# Altium PCB woda.PcbDoc
Units mil, origin at the board's own origin, x right, y up, seen from the top; angles counter-clockwise.
Board outline 1464.6 x 834.68 mil, 2 copper layers (Top Layer, Bottom Layer); 7 components, 5 nets, 17 pads, 3 vias.
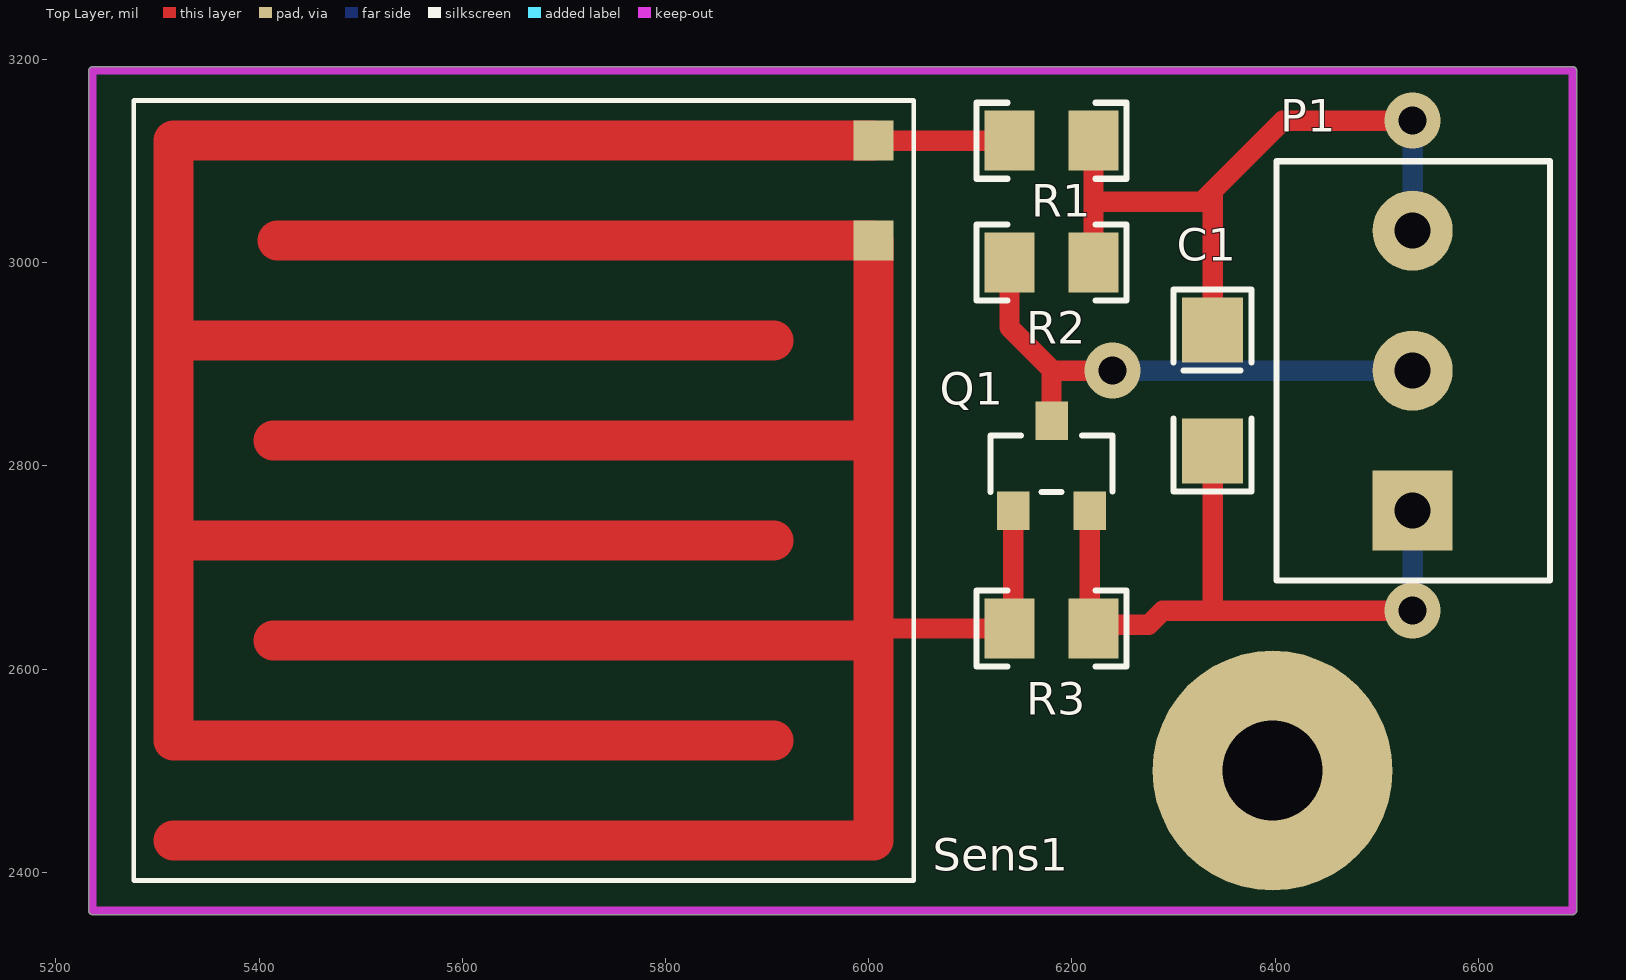
[diagram p0: Top Layer view]
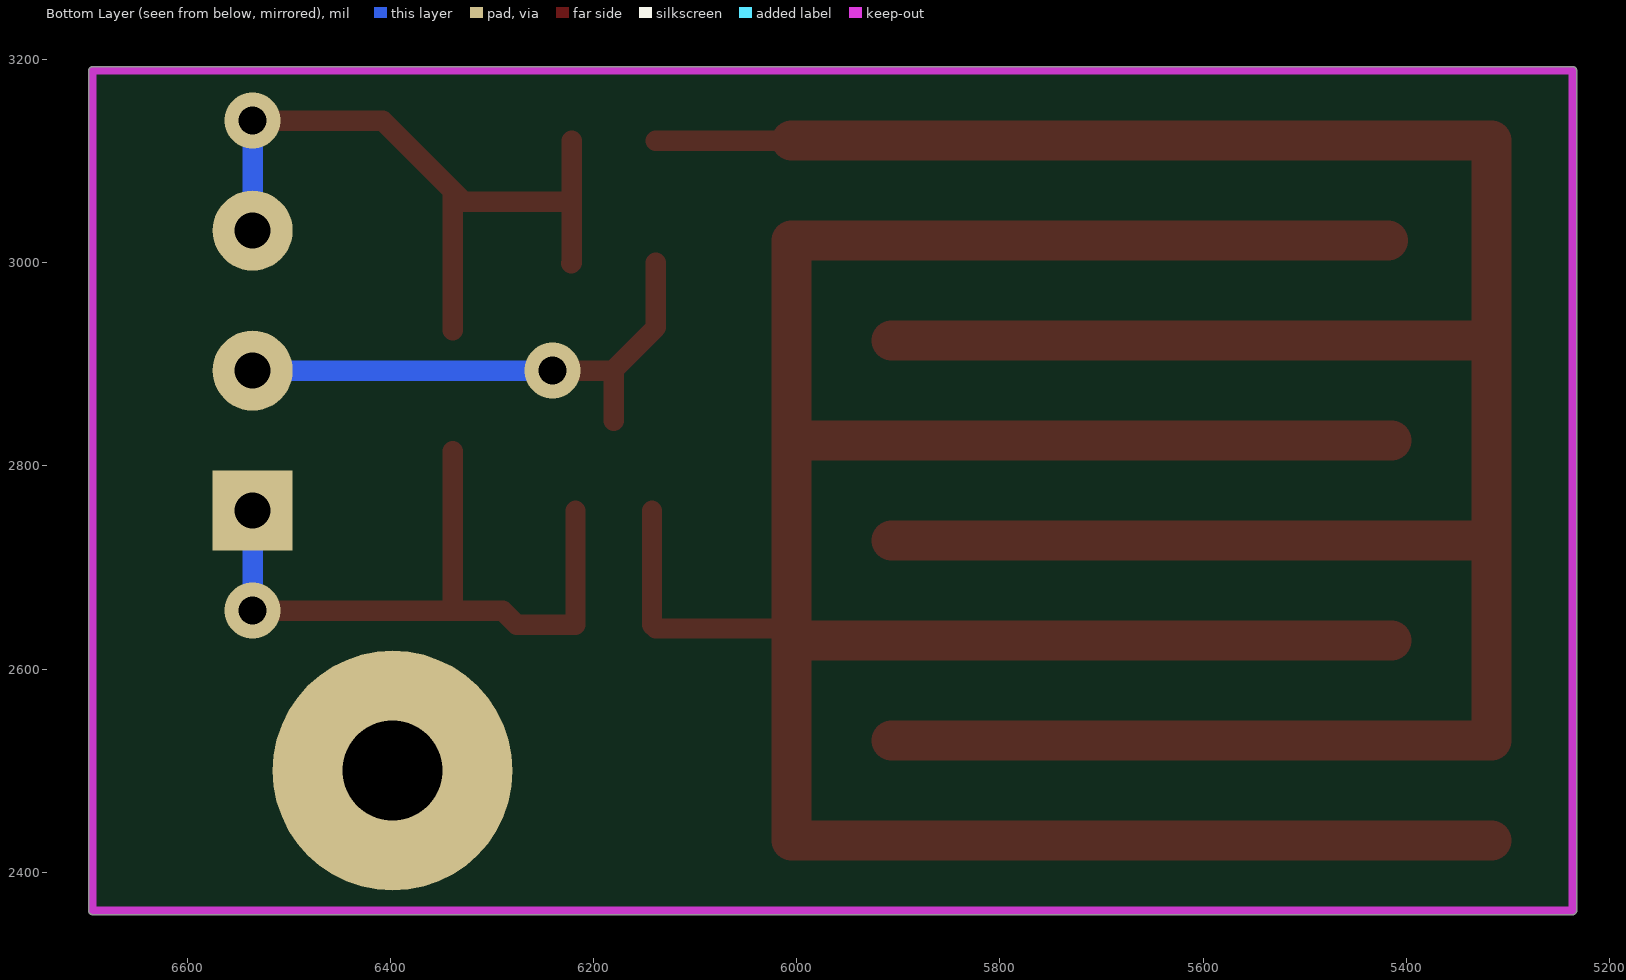
[diagram p1: Bottom Layer view, seen from below]

## Layer stack, top to bottom
Top Layer: signal copper 1.4
Dielectric: dielectric 12.6, FR-4, Dk 4.8
Bottom Layer: signal copper 1.4

## Board outline
5232.27,2362.2 ccw(c5236.22,2362.2) 5236.22,2358.25 6692.91,2358.25 ccw(c6692.91,2362.2) 6696.87,2362.2 6696.87,3188.98 ccw(c6692.91,3188.98) 6692.91,3192.93 5236.22,3192.93 ccw(c5236.22,3188.98) 5232.27,3188.98

## Design rules (kind name [scope] priority, off if disabled: settings)
Clearance [All] p1: gap=10
NetAntennae [All] p1 off: netantennaetolerance=0
PolygonConnect [All] p1: connectstyle=Relief reliefconductorwidth=10 reliefentries=4 polygonreliefangle="90 Angle" airgapwidth=10
RoutingVias [All] p1: holewidth=27.56 width=55.12 viastyle="Through Hole" minholewidth=27.56 minwidth=55.12 maxholewidth=27.56 maxwidth=55.12
SolderMaskExpansion [All] p1: expansion=4
Width [All] p1: maxlimit=39.37 minlimit=10 preferedwidth=10
27 further rules are at their usual default settings.

## Components (designator, comment, footprint, x,y, rotation, side; value= is the part's Value field where it differs from the comment)
C1 "1uF" TANC_A 6338.58,2874.02 r270 top
P1 "ARK 3-Pin" ARK-3.5mm-3pin 6535.43,2755.91 r90 top
Q1 "2N7002" SOT23 6180,2800 r0 top
R1 "10K" R0805 6180,3120 r180 top
R2 "10K" R0805 6180,3000 r0 top
R3 "1M" R0805 6180,2640 r180 top
Sens1 "1.8x1.8" water_sensor 6005,2825 r0 top

## Footprints (in the part's own frame and the unit in brackets; to place one, negate y for a bottom-side part, rotate by r counter-clockwise, add the part's x,y. Pads: shape width x height; smd on the part's side, far side on the other; paste and mask are expansions set on the pad)
ARK-3.5mm-3pin [mm]
  rect 2x2 hole 0.9: 1(0,0)
  round 2 hole 0.9: 2(3.5,0) 3(7,0)
  silkscreen extent -1.75,-3.43 8.73,3.4, body extent -1.76,-3.43 8.74,3.47, height 2.1
R0805 [mm] "Chip Resistor, Body 2.0x1.3mm, IPC Low Density"
  rect 1.25x1.5 smd: 1(-1.05,0) 2(1.05,0)
  silkscreen extent -1.88,-0.95 1.88,0.95, body extent -1.1,-0.67 1.1,0.67, height 0.7
SOT23 [mil]
  rect 32x38 smd: 1(-37.6,-44.33) 2(37.6,-44.33) 3(0,44.33)
  silkscreen extent -60,-26 60,30, body extent -57,-49 57,48, height 40
TANC_A [mil]
  rect 64x60 smd: 1(-59.53,0) 2(59.53,0)
  silkscreen extent -99,-38 99,38, body extent -64,-31 64,31, height 63
water_sensor [mm]
  rect 1x1 smd: 1(0,7.5) 2(0,5)
  Top Layer lines w1: -17.5,-10 0,-10 0,-5 ; -15,-5 0,-5 ; -15,0 0,0 ; -2.5,-7.5 -17.5,-7.5 -17.5,-2.5 ; -2.5,-2.5 -17.5,-2.5 ; -2.5,2.5 -17.5,2.5 ; 0,5 0,0 ; 0,7.5 -17.5,7.5 -17.5,2.5 ; -17.5,-2.5 -17.5,2.5 ; 0,-5 0,-4.318 0,0
  silkscreen extent -18.5,-11 1,8.5

## Part data
C1: library part Cap_Pol, "Capacitor Polarized"
Q1: library part 2N7002(GSD), "N-MOSFET"
R1 R2 R3: library part Res, "Resistor"
Sens1: library part Water_sensor_1

## Free pads (board coordinates)
  round 236.22 hole 98.43: M(6397.64,2500)

## Via types
v1: diameter 55.12, hole 27.56, Top Layer to Bottom Layer, 3 vias

## Nets (pads, with @x,y where several pads share a name; then routed paths per layer and width w, separated by ;. In a path a pad name is that pad's centre, name@x,y a point inside that pad or via, vN(x,y) a via of type N, cw(c..) or ccw(c..) an arc to the next point about the centre after c; other vN are vias at no path point)
12V: C1.1 P1.3 R1.1 R2.2 | length 713.6
  Top Layer w20: R1.1 6221.34,3060 ; R2.2@6221.97,2999.37 R2.2 6221.34,3060 ; C1.1 6338.58,3070.87 ; v1(6535.43,3139.76) 6407.48,3139.76 6338.58,3070.87 ; 6221.34,3060 6327.72,3060 6338.58,3070.87
  Bottom Layer w20: P1.3 v1(6535.43,3139.76)
GND: C1.2 P1.1 Q1.2 R3.1 | length 690.9
  Top Layer w20: Q1.2 6217.6,2643.74 6275.63,2643.74 6289.37,2657.48 6338.58,2657.48 ; C1.2 6338.58,2657.48 ; v1(6535.43,2657.48) 6338.58,2657.48
  Bottom Layer w20: v1(6535.43,2657.48) P1.1
NetQ1_1: Q1.1 R3.2 Sens1.2 | length 1210.8
  Top Layer w20: Sens1.2 6005,2825 6005,2655 6020,2640 R3.2 6142.4,2643.74 Q1.1
  Top Layer w39.37: 5418.15,3021.85 Sens1.2
NetR1_2: R1.2 Sens1.1 | length 133.7
  Top Layer w20: Sens1.1@6005,3120 R1.2
OUT: P1.2 Q1.3 R2.1 | length 488.2
  Top Layer w20: R2.1 6138.66,2936.14 6181.1,2893.7 v1(6240.16,2893.7) ; Q1.3 6180,2893.7
  Bottom Layer w20: v1(6240.16,2893.7) P1.2@6496.06,2893.7

## Keep-outs
Keep-Out Layer:
  lines w7.87: 5236.22,2362.2 6692.91,2362.2 6692.91,3188.98 5236.22,3188.98 5236.22,2362.2